# EAGLE board controller (EAGLE 9.6.2)
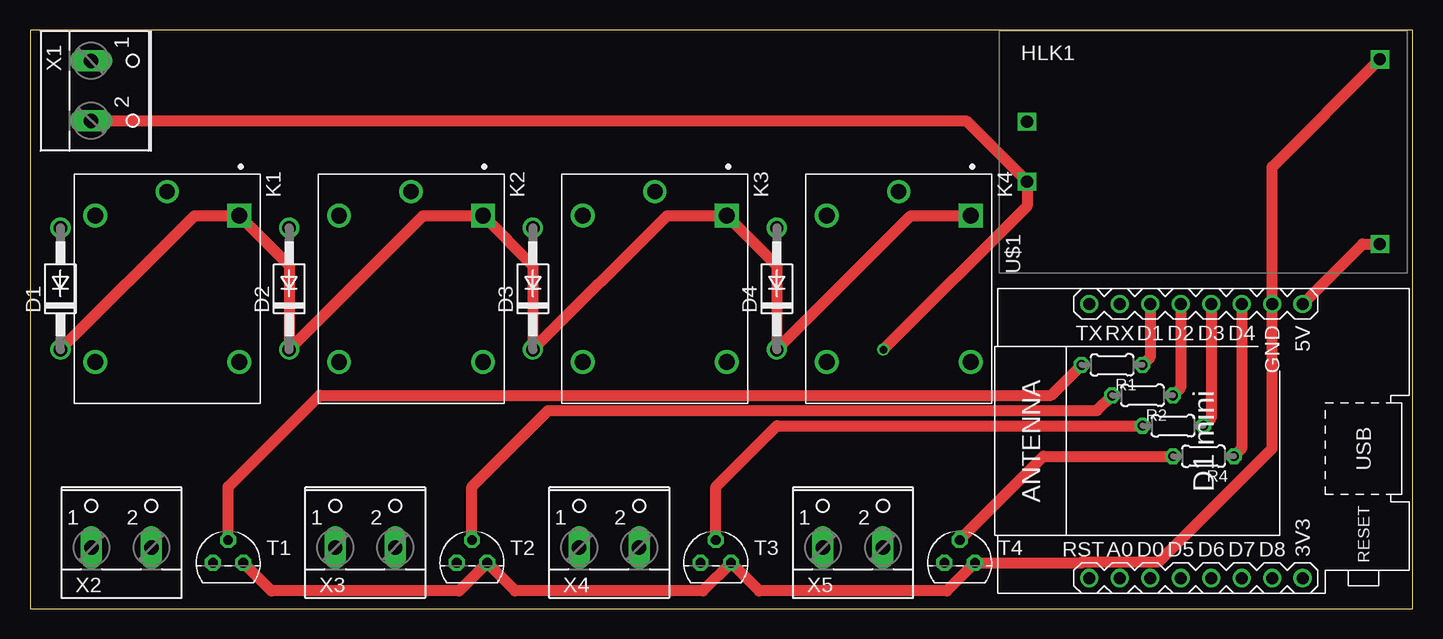
[diagram p0: board, top side]
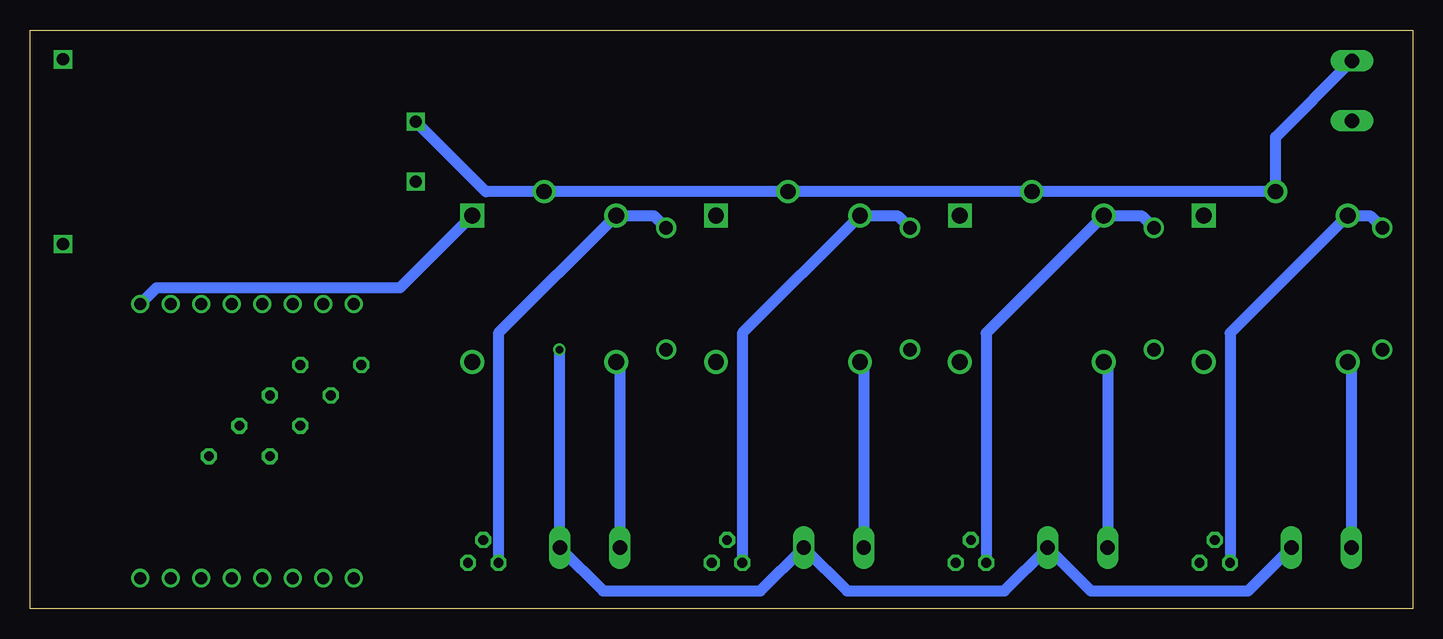
[diagram p1: board, bottom side, seen from below]

Size 115.24 x 48.25 mm. Coordinates in mm from the lower left corner, seen from the top.
Outline: 0,0 115.24,0 115.24,48.25 0,48.25 0,0
Copper layers (1*16): Top 0.035mm / dielectric 1.5mm / Bottom 0.035mm
Design rules "default": minimum track width 6mil, minimum drill 0.35mm, track to track 6mil, track to pad 6mil, pad to pad 6mil, via to via 6mil, smd to smd 6mil, copper to edge 40mil, drill to drill 6mil, minimum pad ring 10mil, minimum via ring 8mil, stop-mask expansion 4mil, vias tented up to drill 0mil, thermal gap 10mil

## Footprints (pad centres in the part's own frame; a part is rotated, then mirrored left to right if it is on the bottom)
DO41-10 = drill 1.118: A 5.08,0; C -5.08,0
HLK-PM01 = drill 1.016 square: P$1 -14.7,2.5; P$2 -14.7,-2.5; P$3 14.7,7.7; P$4 14.7,-7.7
RELAY_SRD-05VDC-SL-C = drill 1.32 square: A1 -6.1,6 | drill 1.32: A2 -6.1,-6; NC 6.1,6; NO 6.1,-6 | drill 1.29: COM -8.1,0
0204/5 = drill 0.813 octagon: 1 -2.54,0; 2 2.54,0
TO92 = drill 0.813 octagon: 1 1.27,0; 2 0,1.905; 3 -1.27,0
WEMOS-D1-MINI = drill 1: JP1.1 -11.43,9.525; JP1.2 -11.43,6.985; JP1.3 -11.43,4.445; JP1.4 -11.43,1.905; JP1.5 -11.43,-0.635; JP1.6 -11.43,-3.175; JP1.7 -11.43,-5.715; JP1.8 -11.43,-8.255; JP2.1 11.43,9.525; JP2.2 11.43,6.985; JP2.3 11.43,4.445; JP2.4 11.43,1.905; JP2.5 11.43,-0.635; JP2.6 11.43,-3.175; JP2.7 11.43,-5.715; JP2.8 11.43,-8.255
W237-102 = drill 1.194 long: 1 -2.5,-1.27; 2 2.5,-1.27

## Placement (x,y rotation side)
D1  1N4001  [DO41-10]  2.54,26.67 90 top
D2  1N4001  [DO41-10]  21.59,26.67 90 top
D3  1N4001  [DO41-10]  41.91,26.67 90 top
D4  1N4001  [DO41-10]  62.23,26.67 90 top
HLK1  HLK-PM013W  [HLK-PM01]  97.79,38.1 0 top
K1  SRD-05VDC-SL-C  [RELAY_SRD-05VDC-SL-C]  11.43,26.67 270 top
K2  SRD-05VDC-SL-C  [RELAY_SRD-05VDC-SL-C]  31.75,26.67 270 top
K3  SRD-05VDC-SL-C  [RELAY_SRD-05VDC-SL-C]  52.07,26.67 270 top
K4  SRD-05VDC-SL-C  [RELAY_SRD-05VDC-SL-C]  72.39,26.67 270 top
R1  1k  [0204/5]  90.17,20.32 180 top
R2  1k  [0204/5]  92.71,17.78 180 top
R3  1k  [0204/5]  95.25,15.24 180 top
R4  1k  [0204/5]  97.79,12.7 180 top
T1  BC547  [TO92]  16.51,3.81 0 top
T2  BC547  [TO92]  36.83,3.81 0 top
T3  BC547  [TO92]  57.15,3.81 0 top
T4  BC547  [TO92]  77.47,3.81 0 top
U$1  WEMOS-D1-MINI  [WEMOS-D1-MINI]  97.79,13.97 90 top
X1  VCC  [W237-102]  6.35,43.18 270 top
X2  IN1  [W237-102]  7.62,6.35 0 top
X3  IN2  [W237-102]  27.94,6.35 0 top
X4  IN3  [W237-102]  48.26,6.35 0 top
X5  IN4  [W237-102]  68.58,6.35 0 top

## Library data of the parts
D1-D4 = tango
HLK1 = HLK-PM01
K1-K4 = SRD-05VDC-SL-C (1); AVAILABILITY: Unavailable; DESCRIPTION: 5V Trigger Relay Module For Arduino And Raspberry Pi 5V Trigger Relay Module For Arduino And Raspberry Pi; MF: Songle Relay; MP: SRD-05VDC-SL-C; PACKAGE: None; PRICE: None
R1-R4 = rcl; SPICEPREFIX: R
T1-T4 = transistor
U$1 = diy-modules
X1-X5 = con-wago-500; MPN: 237-102; OC_FARNELL: unknown; OC_NEWARK: 70K9898

## Nets
0V: HLK1.P$2 X1.2 X2.2 X3.2 X4.2 X5.2
3V3: U$1.JP1.8
+5V: D1.C D2.C D3.C D4.C HLK1.P$4 K1.A1 K2.A1 K3.A1 K4.A1 U$1.JP2.8
GND: HLK1.P$3 T1.1 T2.1 T3.1 T4.1 U$1.JP2.7
N$1: D1.A K1.A2 T1.3
N$2: K1.NO X2.1
N$3: D2.A K2.A2 T2.3
N$4: D3.A K3.A2 T3.3
N$5: D4.A K4.A2 T4.3
N$7: R3.2 T3.2
N$8: R2.2 T2.2
N$9: R1.2 T1.2
N$10: R4.2 T4.2
N$11: K2.NO X3.1
N$12: K3.NO X4.1
N$13: K4.NO X5.1
N$14: R1.1 U$1.JP2.3
N$15: R2.1 U$1.JP2.4
N$16: R3.1 U$1.JP2.5
N$17: R4.1 U$1.JP2.6
VCC: HLK1.P$1 K1.COM K2.COM K3.COM K4.COM X1.1

## Tracks (layer width: path | path; a pad name or v marks a point on that pad's centre or on a via)
0V  (via drill 0.6)
  Top 0.152: 30.38,5.03 X3.2 30.53,5.03 | 83.01,35.51 HLK1.P$2
  Top 0.914: X1.2 78.01,40.68 HLK1.P$2 83.09,33.56 v71.12,21.59
  Bottom 0.914: X2.2 13.73,1.47 26.83,1.47 X3.2 34.05,1.47 47.15,1.47 X4.2 54.37,1.47 67.47,1.47 X5.2 71.08,21.55 v71.12,21.59
+5V
  Top 0.914: U$1.JP2.8 111.05,30.4 HLK1.P$4 | K4.A1 73.41,32.77 D4.C 62.23,28.61 K3.A1 53.09,32.77 D3.C 41.91,28.61 K2.A1 32.77,32.77 D2.C 21.59,28.61 K1.A1 13.72,32.77 D1.C
  Bottom 0.152: 58.17,32.87 K3.A1 | 105.97,25.45 U$1.JP2.8 | 78.44,32.87 K4.A1
  Bottom 0.914: K4.A1 84.4,26.76 104.68,26.76 U$1.JP2.8
GND
  Top 0.914: HLK1.P$3 103.5,36.81 U$1.JP2.7 103.5,13.34 94.07,3.9 87.7,3.9 87.61,3.81 T4.1 76.4,1.47 60.76,1.47 T3.1 56.08,1.47 40.44,1.47 T2.1 35.76,1.47 20.12,1.47 T1.1
N$1
  Bottom 0.914: T1.3 15.24,22.96 K1.A2 3.56,32.77 D1.A
N$2
  Bottom 0.914: K1.NO 5.12,20.26 X2.1
N$3
  Bottom 0.914: T2.3 35.56,22.96 K2.A2 22.61,32.77 D2.A
N$4
  Bottom 0.914: T3.3 55.88,22.96 K3.A2 42.93,32.77 D3.A
N$5
  Bottom 0.914: T4.3 76.2,22.96 K4.A2 63.25,32.77 D4.A
N$7
  Top 0.914: T3.2 57.15,10.16 62.23,15.24 R3.2
N$8
  Top 0.914: T2.2 36.83,10.16 43.18,16.51 88.9,16.51 R2.2
N$9
  Top 0.914: T1.2 16.51,10.16 24.13,17.78 85.09,17.78 R1.2
N$10
  Top 0.914: T4.2 84.45,12.7 R4.2
N$11
  Bottom 0.914: K2.NO 25.44,20.26 X3.1
N$12
  Bottom 0.914: K3.NO 45.76,20.26 X4.1
N$13
  Bottom 0.914: K4.NO 66.08,20.26 X5.1
N$14
  Top 0.914: U$1.JP2.3 93.34,20.95 R1.1
N$15
  Top 0.914: U$1.JP2.4 95.89,18.41 R2.1
N$16
  Top 0.914: U$1.JP2.5 98.42,15.88 R3.1
N$17
  Top 0.914: U$1.JP2.6 100.97,13.34 R4.1
VCC
  Bottom 0.152: 72.34,34.85 K4.COM
  Bottom 0.914: X1.1 11.43,39.33 K1.COM K2.COM K3.COM K4.COM 77.26,34.77 HLK1.P$1